# Altium PCB CONTROLADOR-V1.PcbDoc (part 1 of 2)
Units mm, origin at the board's own origin, x right, y up, seen from the top; angles counter-clockwise.
Board outline 162 x 145 mm, 2 copper layers (Top Layer, Bottom Layer); 135 components, 127 nets, 433 pads, 36 vias.
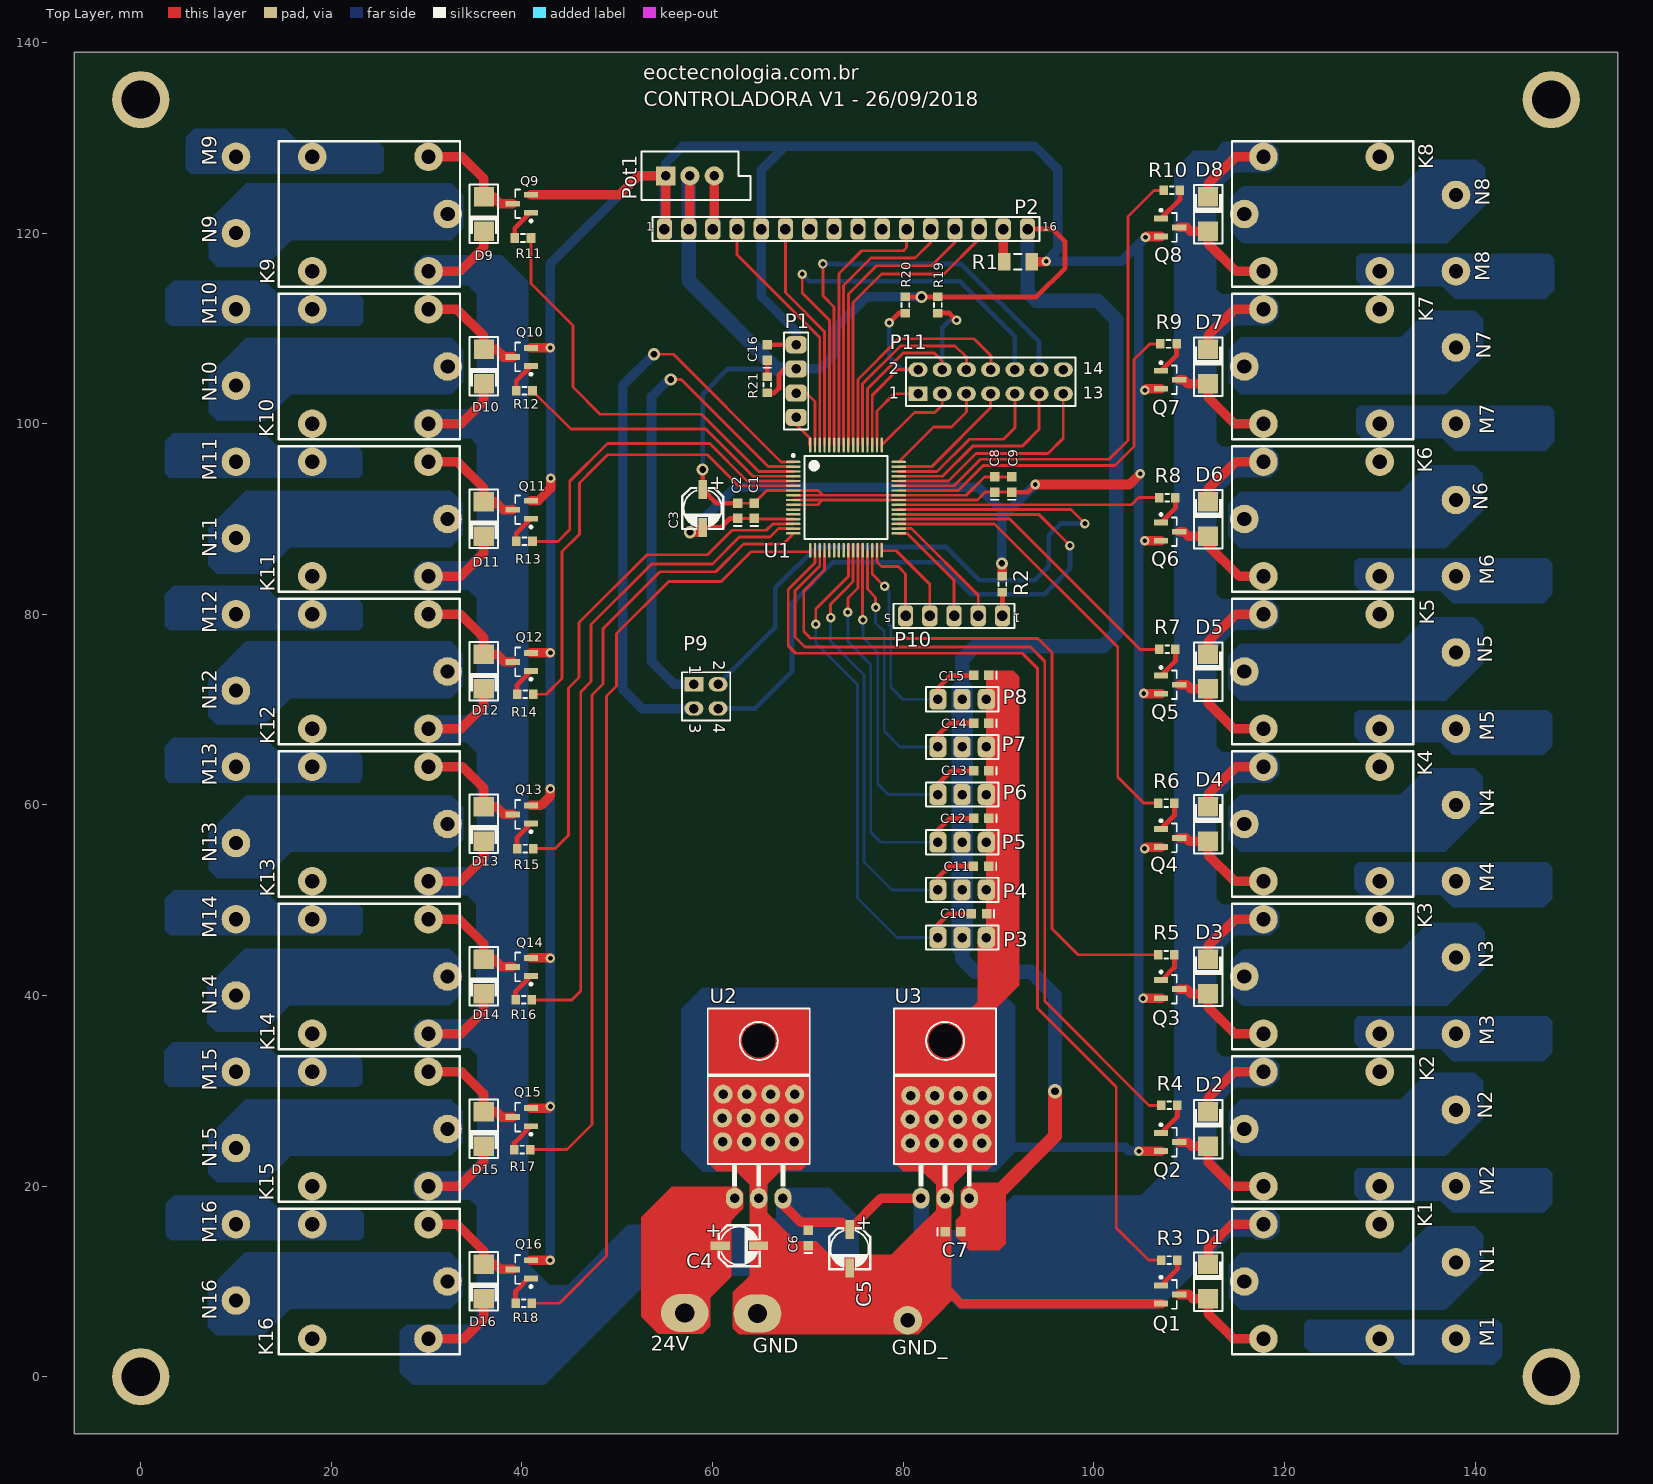
[diagram p0: Top Layer view]
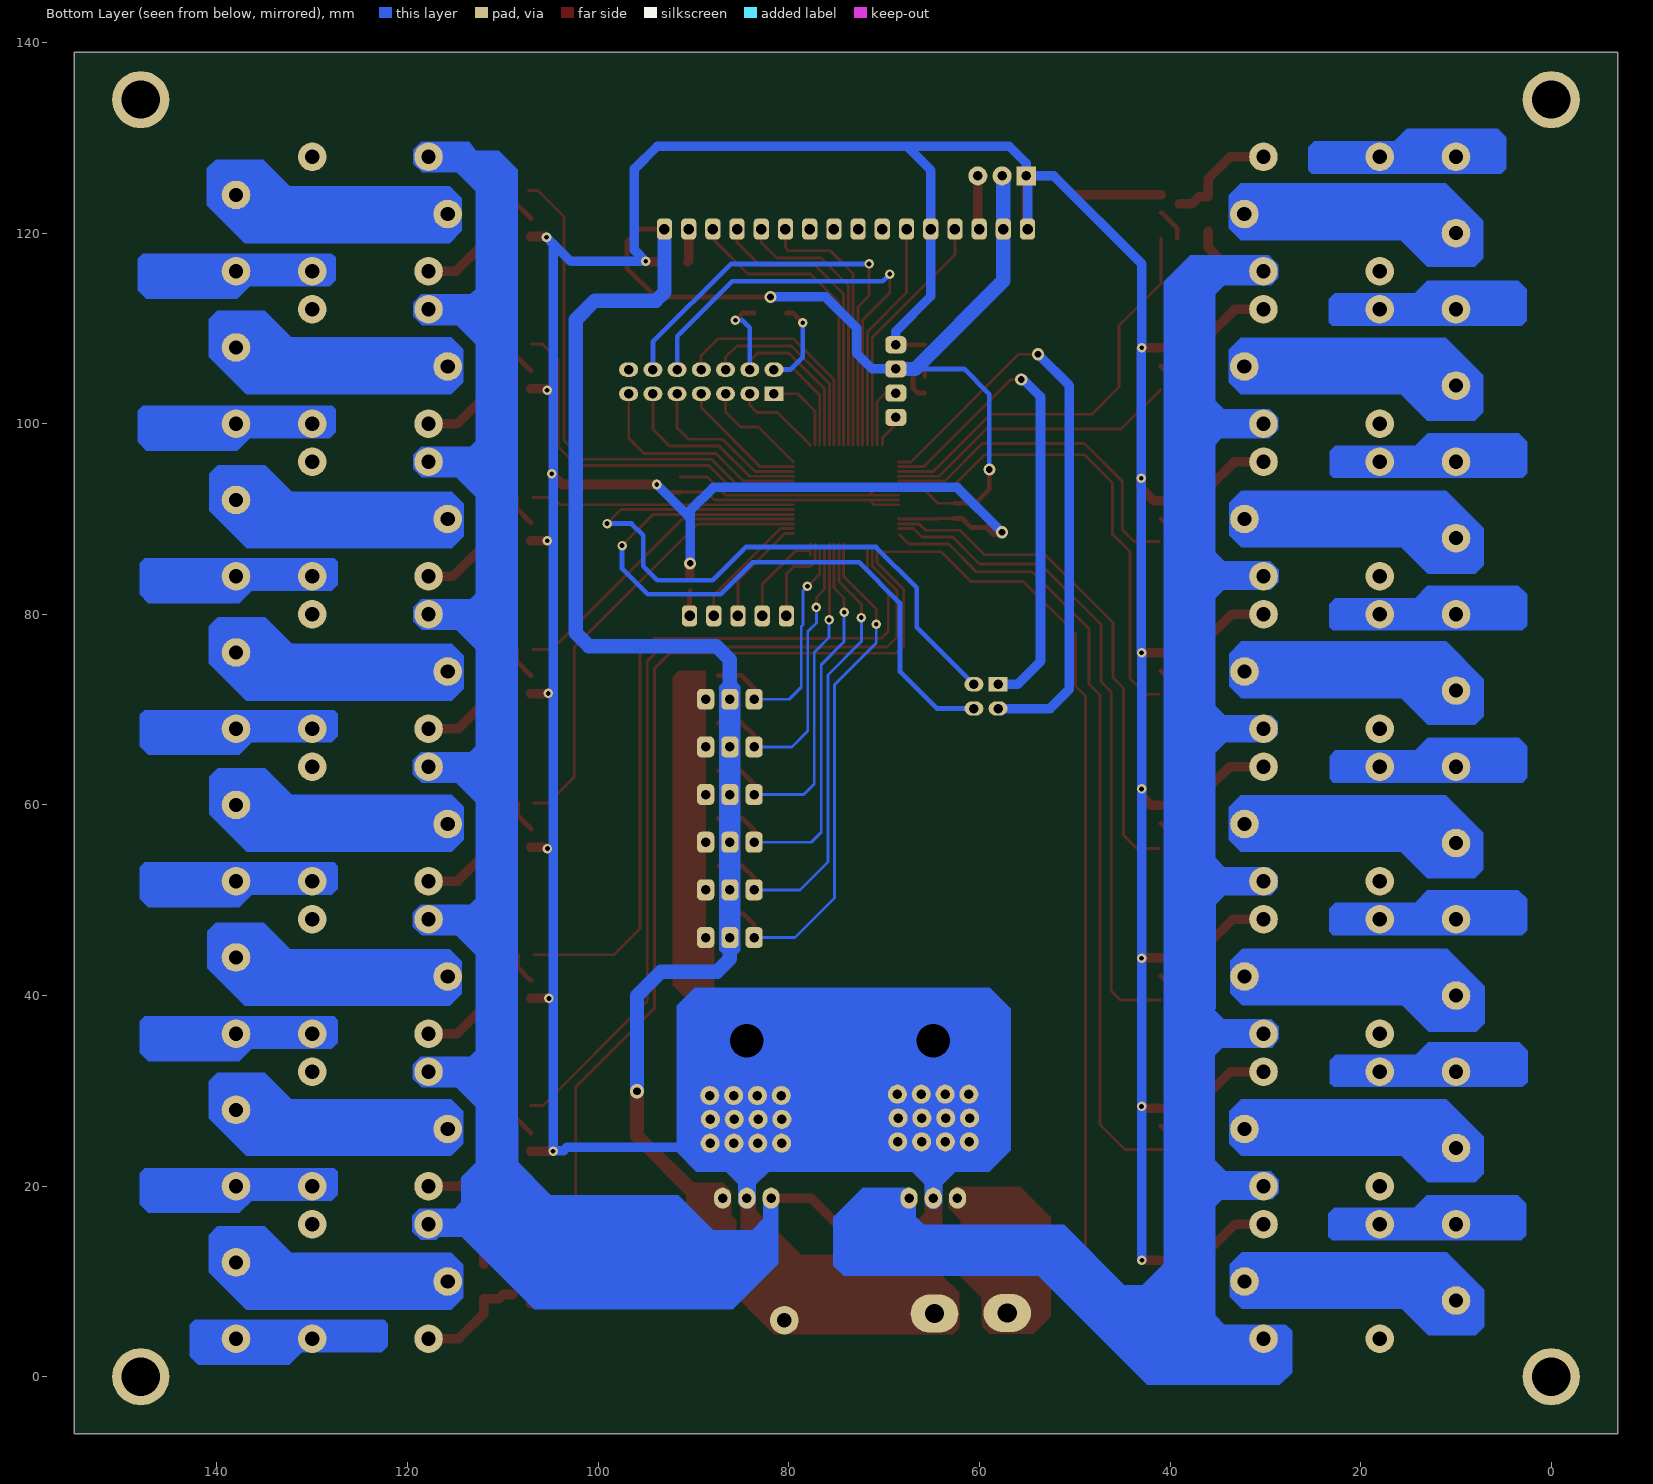
[diagram p1: Bottom Layer view, seen from below]

## Layer stack, top to bottom
Top Solder: solder mask 0.0102, Solder Resist, Dk 3.5
Top Layer: signal copper 0.0356
Dielectric 1: dielectric 0.32, FR-4, Dk 4.8
Bottom Layer: signal copper 0.0356
Bottom Solder: solder mask 0.0102, Solder Resist, Dk 3.5

## Board outline
-7,-6 -7,139 155,139 155,-6

## Design rules (kind name [scope] priority, off if disabled: settings)
Clearance [All] p1: gap=0.35 ignorepadtopadclearanceinfootprint=FALSE
PolygonConnect [All] p1: connectstyle=Relief reliefconductorwidth=0.254 reliefentries=4 polygonreliefangle="90 Angle" airgapwidth=0.254
RoomDefinition lavadora [InComponentClass('lavadora')] p1: confinementstyle=ConfineIn formatcopy=TRUE lockcomponents=FALSE outline -6.727,-5.921 154.879,-5.921 154.879,138.818 -6.727,138.818
RoomDefinition reles [InComponentClass('reles')] p2: confinementstyle=ConfineIn formatcopy=TRUE lockcomponents=FALSE outline -7.049,-5.714 154.879,-5.714 154.879,138.818 -7.049,138.818
RoutingVias [All] p1: holewidth=0.711 width=1.27 viastyle="Through Hole" minholewidth=0.711 minwidth=1.27 maxholewidth=0.711 maxwidth=1.27
SolderMaskExpansion [All] p1: expansion=0.102
Width [All] p1: maxlimit=3 minlimit=0.3 preferedwidth=1 minimp=50.000000 maximp=50.000000 favimp=50.000000
30 further rules are at their usual default settings.

## Classes and differential pairs
component class lavadora: 24V C1 C2 C3 C4 C5 C6 C7 C8 C9 C10 C11 C12 C13 C14 C15 C16 GND GND_ P1 P2 P3 P4 P5 P6 P7 P8 P9 P10 P11 Pot1 R1 R2 R19 R20 R21 U1 U2 U3
component class reles: D1 D2 D3 D4 D5 D6 D7 D8 D9 D10 D11 D12 D13 D14 D15 D16 K1 K2 K3 K4 K5 K6 K7 K8 K9 K10 K11 K12 K13 K14 K15 K16 M1 M2 M3 M4 M5 M6 M7 M8 M9 M10 M11 M12 M13 M14 M15 M16 N1 N2 N3 N4 N5 N6 N7 N8 N9 N10 N11 N12 N13 N14 N15 N16 Q1 Q2 Q3 Q4 Q5 Q6 Q7 Q8 Q9 Q10 Q11 Q12 Q13 Q14 Q15 Q16 R3 R4 R5 R6 R7 R8 R9 R10 R11 R12 R13 R14 R15 R16 R17 R18

## Components (designator, comment, footprint, x,y, rotation, side; value= is the part's Value field where it differs from the comment)
24V "PAD 1.5x3mm" "PAD 1.5x3mm"#1 54.445,6.968 r0 top
C1 "100nF 50V" CAPC0603N 64.35,90.86 r90 top
C2 "100nF 50V" CAPC0603N 62.618,90.86 r90 top
C3 "10uF 25V" "CAP_ELETR_4X5.4 SMD" 58.961,91.105 r270 top
C4 "1uF 50V" "CAP_ELETR_4X5.4 SMD" 62.805,13.762 r0 top
C5 "1uF 50V" "CAP_ELETR_4X5.4 SMD" 74.373,13.431 r270 top
C6 "100nF 50V" CAPC0603N 70.05,14.57 r90 top
C7 "100nF 50V" CAPC0603N 85.219,15.228 r0 top
C8 "100nF 50V" CAPC0603N 89.601,93.62 r90 top
C9 "100nF 50V" CAPC0603N 91.388,93.62 r90 top
C10 "100nF 50V" CAPC0603N 87.947,48.589 r180 top
C11 "100nF 50V" CAPC0603N 88.163,53.589 r180 top
C12 "100nF 50V" CAPC0603N 88.183,58.589 r180 top
C13 "100nF 50V" CAPC0603N 88.183,63.589 r180 top
C14 "100nF 50V" CAPC0603N 88.183,68.589 r180 top
C15 "100nF 50V" CAPC0603N 88.183,73.589 r180 top
C16 "100nF 50V" CAPC0603N 65.741,107.475 r90 top
D1 "M7" "DO-214AC - SMA" 112,10 r270 top
D2 "M7" "DO-214AC - SMA" 112,26 r270 top
D3 "M7" "DO-214AC - SMA" 112,42 r270 top
D4 "M7" "DO-214AC - SMA" 112,58 r270 top
D5 "M7" "DO-214AC - SMA" 112,74 r270 top
D6 "M7" "DO-214AC - SMA" 112,90 r270 top
D7 "M7" "DO-214AC - SMA" 112,106 r270 top
D8 "M7" "DO-214AC - SMA" 112,122 r270 top
D9 "M7" "DO-214AC - SMA" 36,122 r90 top
D10 "M7" "DO-214AC - SMA" 36,106 r90 top
D11 "M7" "DO-214AC - SMA" 35.992,90 r90 top
D12 "M7" "DO-214AC - SMA" 35.992,74 r90 top
D13 "M7" "DO-214AC - SMA" 35.992,58 r90 top
D14 "M7" "DO-214AC - SMA" 35.992,42 r90 top
D15 "M7" "DO-214AC - SMA" 35.992,26 r90 top
D16 "M7" "DO-214AC - SMA" 35.992,10 r90 top
GND "PAD 1.5x3mm" "PAD 1.5x3mm"#2 57.784,6.918 r0 top
GND_ "PAD 1.5x3mm" "PAD 1.5x3mm"#3 80.465,5.935 r90 top
K1 "AZ1RC2" "RELE SPDT" 124,10 r0 top
K2 "AZ1RC2" "RELE SPDT" 124,26 r0 top
K3 "AZ1RC2" "RELE SPDT" 124,42 r0 top
K4 "AZ1RC2" "RELE SPDT" 124,58 r0 top
K5 "AZ1RC2" "RELE SPDT" 124,74 r0 top
K6 "AZ1RC2" "RELE SPDT" 124,90 r0 top
K7 "AZ1RC2" "RELE SPDT" 124,106 r0 top
K8 "AZ1RC2" "RELE SPDT" 124,122 r0 top
K9 "AZ1RC2" "RELE SPDT" 24,122 r180 top
K10 "AZ1RC2" "RELE SPDT" 24,106 r180 top
K11 "AZ1RC2" "RELE SPDT" 23.992,90 r180 top
K12 "AZ1RC2" "RELE SPDT" 23.992,74 r180 top
K13 "AZ1RC2" "RELE SPDT" 23.992,58 r180 top
K14 "AZ1RC2" "RELE SPDT" 23.992,42 r180 top
K15 "AZ1RC2" "RELE SPDT" 23.992,26 r180 top
K16 "AZ1RC2" "RELE SPDT" 23.992,10 r180 top
M1 "PAD 1.5x3mm" "PAD 1.5x3mm"#4 138.496,4.025 r90 top
M2 "PAD 1.5x3mm" "PAD 1.5x3mm"#5 137.454,19.994 r90 top
M3 "PAD 1.5x3mm" "PAD 1.5x3mm"#6 136.381,35.149 r90 top
M4 "PAD 1.5x3mm" "PAD 1.5x3mm"#7 137.471,51.994 r90 top
M5 "PAD 1.5x3mm" "PAD 1.5x3mm"#8 137.686,68.13 r90 top
M6 "PAD 1.5x3mm" "PAD 1.5x3mm"#9 136.529,84.099 r90 top
M7 "PAD 1.5x3mm" "PAD 1.5x3mm"#10 136.679,99.989 r0 top
M8 "PAD 1.5x3mm" "PAD 1.5x3mm"#11 137.382,116.165 r0 top
M9 "PAD 1.5x3mm" "PAD 1.5x3mm"#12 10.134,127.973 r0 top
M10 "PAD 1.5x3mm" "PAD 1.5x3mm"#13 6.667,113.611 r0 top
M11 "PAD 1.5x3mm" "PAD 1.5x3mm"#14 9.912,96.244 r0 top
M12 "PAD 1.5x3mm" "PAD 1.5x3mm"#15 -16.079,80 r0 top
M13 "PAD 1.5x3mm" "PAD 1.5x3mm"#16 10.762,64.087 r0 top
M14 "PAD 1.5x3mm" "PAD 1.5x3mm"#17 11.137,47.964 r0 top
M15 "PAD 1.5x3mm" "PAD 1.5x3mm"#18 10.387,32.028 r90 top
M16 "PAD 1.5x3mm" "PAD 1.5x3mm"#19 10.575,15.905 r270 top
N1 "PAD 1.5x3mm" "PAD 1.5x3mm"#20 137.816,11.35 r90 top
N2 "PAD 1.5x3mm" "PAD 1.5x3mm"#21 138.467,25.941 r90 top
N3 "PAD 1.5x3mm" "PAD 1.5x3mm"#22 137.816,41.275 r90 top
N4 "PAD 1.5x3mm" "PAD 1.5x3mm"#23 136.838,56.053 r90 top
N5 "PAD 1.5x3mm" "PAD 1.5x3mm"#24 137.259,74.917 r90 top
N6 "PAD 1.5x3mm" "PAD 1.5x3mm"#25 137.723,91.459 r180 top
N7 "PAD 1.5x3mm" "PAD 1.5x3mm"#26 138.746,106.607 r90 top
N8 "PAD 1.5x3mm" "PAD 1.5x3mm"#27 138.095,121.198 r90 top
N9 "PAD 1.5x3mm" "PAD 1.5x3mm"#28 10.783,122.137 r0 top
N10 "PAD 1.5x3mm" "PAD 1.5x3mm"#29 10.048,105.82 r0 top
N11 "PAD 1.5x3mm" "PAD 1.5x3mm"#30 -1.261,90.089 r0 top
N12 "PAD 1.5x3mm" "PAD 1.5x3mm"#31 -5.23,72.82 r0 top
N13 "PAD 1.5x3mm" "PAD 1.5x3mm"#32 -0.268,55.949 r0 top
N14 "PAD 1.5x3mm" "PAD 1.5x3mm"#33 -1.658,42.254 r0 top
N15 "PAD 1.5x3mm" "PAD 1.5x3mm"#34 0.526,25.978 r0 top
N16 "PAD 1.5x3mm" "PAD 1.5x3mm"#35 10.074,7.992 r0 top
P1 "GRAVAÇÃO" "HEADER 4X2.54MM" 68.773,104.478 r90 top
P2 "BPSC-16" BPSC-16 74,120.421 r0 top
P3 "SENSOR" "HEADER 3X2.54MM" 86.183,46.089 r180 top
P4 "SENSOR" "HEADER 3X2.54MM" 86.183,51.089 r180 top
P5 "SENSOR" "HEADER 3X2.54MM" 86.183,56.089 r180 top
P6 "SENSOR" "HEADER 3X2.54MM" 86.183,61.089 r180 top
P7 "SENSOR" "HEADER 3X2.54MM" 86.183,66.089 r180 top
P8 "SENSOR" "HEADER 3X2.54MM" 86.183,71.089 r180 top
P9 "AUXILIAR" HDR2X2 58.042,72.656 r270 top
P10 "TECLAS" BPSC-5 85.334,79.841 r180 top
P11 "AUXILIAR" HDR2X7 81.558,103.136 r0 top
Pot1 "RPot" VR5 57.627,126 r0 top value=10K
Q1 "BC817" SOT23-3N 108,8.635 r0 top
Q2 "BC817" SOT23-3N 108,24.633 r0 top
Q3 "BC817" SOT23-3N 108,40.677 r0 top
Q4 "BC817" SOT23-3N 108,56.533 r0 top
Q5 "BC817" SOT23-3N 108,72.624 r0 top
Q6 "BC817" SOT23-3N 108,88.677 r0 top
Q7 "BC817" SOT23-3N 108,104.608 r0 top
Q8 "BC817" SOT23-3N 108,120.591 r0 top
Q9 "BC817" SOT23-3N 40,123.074 r180 top
Q10 "BC817" SOT23-3N 40,107 r180 top
Q11 "BC817" SOT23-3N 39.992,90.967 r180 top
Q12 "BC817" SOT23-3N 39.992,75 r180 top
Q13 "BC817" SOT23-3N 39.992,59 r180 top
Q14 "BC817" SOT23-3N 39.992,43 r180 top
Q15 "BC817" SOT23-3N 39.992,27.25 r180 top
Q16 "BC817" SOT23-3N 39.992,11.265 r180 top
R1 "470R 1/4W" RESC1206N 92.038,117 r180 top
R2 "1k 1/10W" RESC0603N 90.417,83.164 r270 top
R3 "2k2 1/10W" RESC0603N 107.927,12.249 r0 top
R4 "2k2 1/10W" RESC0603N 107.927,28.48 r0 top
R5 "2k2 1/10W" RESC0603N 107.609,44.288 r0 top
R6 "2k2 1/10W" RESC0603N 107.609,60.201 r0 top
R7 "2k2 1/10W" RESC0603N 107.716,76.327 r0 top
R8 "2k2 1/10W" RESC0603N 107.716,92.241 r0 top
R9 "2k2 1/10W" RESC0603N 107.835,108.365 r0 top
R10 "2k2 1/10W" RESC0603N 108.181,124.485 r0 top
R11 "2k2 1/10W" RESC0603N 40.1,119.484 r180 top
R12 "2k2 1/10W" RESC0603N 40.259,103.45 r180 top
R13 "2k2 1/10W" RESC0603N 40.259,87.655 r180 top
R14 "2k2 1/10W" RESC0603N 40.339,71.621 r180 top
R15 "2k2 1/10W" RESC0603N 40.339,55.427 r180 top
R16 "2k2 1/10W" RESC0603N 40.18,39.552 r180 top
R17 "2k2 1/10W" RESC0603N 40.02,23.837 r180 top
R18 "2k2 1/10W" RESC0603N 40.18,7.723 r180 top
R19 "10k 1/10W" RESC0603N 83.649,112.458 r270 top
R20 "10k 1/10W" RESC0603N 80.232,112.458 r270 top
R21 "10k 1/10W" RESC0603N 65.741,104.08 r270 top
U1 "MC9S08PA60" LQFP64 74,92.241 r0 top
U2 "LM7812CT" TO220_90 64.844,28.692 r270 top
U3 "LM7805CT" TO220_90 84.4,28.692 r270 top

## Footprints (in the part's own frame and the unit in brackets; to place one, negate y for a bottom-side part, rotate by r counter-clockwise, add the part's x,y. Pads: shape width x height; smd on the part's side, far side on the other; paste and mask are expansions set on the pad)
BPSC-5 [mm]
  rrect50% 1.6x2.2 hole 1.1: 1(-5.08,0) 2(-2.54,0) 3(0,0) 4(2.54,0) 5(5.08,0)
  silkscreen extent -6.35,-1.27 6.35,1.27, body extent -6.35,-1.24 6.35,1.24, height 8.54
BPSC-16 [mm]
  rrect50% 1.6x2.2 hole 1.1: 1(-19.05,0) 2(-16.51,0) 3(-13.97,0) 4(-11.43,0) 5(-8.89,0) 6(-6.35,0) 7(-3.81,0) 8(-1.27,0) 9(1.27,0) 10(3.81,0) 11(6.35,0) 12(8.89,0) 13(11.43,0) 14(13.97,0) 15(16.51,0) 16(19.05,0)
  silkscreen extent -20.32,-1.27 20.32,1.27, body extent -20.32,-1.24 20.32,1.25, height 8.54
"CAP_ELETR_4X5.4 SMD" [mm]
  rect 2x0.9 smd: 1(-2,0) 2(2,0)
  silkscreen extent -2.15,-2.15 2.15,2.15, body extent -2.5,-2.15 2.5,2.15, height 5.4
CAPC0603N [mm] "Chip Capacitor, Body 1.6x0.8mm, IPC Medium Density"
  rect 1x1 smd: 1(-0.8,0) 2(0.8,0)
  silkscreen extent -1.6,-0.4 -1.6,0.4, body extent -0.8,-0.4 0.8,0.4, height 0.9
"DO-214AC - SMA" [mm] "Surface Mount Glass Passivated Rectifier, Body 5.69x2.9mm,"
  rect 2x2.1 smd: 1(-1.81,0) 2(1.81,0)
  silkscreen extent -3.05,-1.5 3.09,1.5, body extent -2.5,-1.35 2.5,1.35, height 2.15
HDR2X2 [mm] "Connector; Header; 2x2 Position"
  rect 1.5x2 hole 1: 1(0,0)
  oval 1.5x2 hole 1: 2(0,2.54) 3(2.54,0) 4(2.54,2.54)
  silkscreen extent -1.27,-1.27 3.81,3.81
HDR2X7 [mm] "Connector; Header; 7x2 Position"
  rect 2x1.5 hole 1: 1(0,0)
  oval 2x1.5 hole 1: 2(0,2.54) 3(2.54,0) 4(2.54,2.54) 5(5.08,0) 6(5.08,2.54) 7(7.62,0) 8(7.62,2.54) 9(10.16,0) 10(10.16,2.54) 11(12.7,0) 12(12.7,2.54) 13(15.24,0) 14(15.24,2.54)
  silkscreen extent -1.27,-1.27 16.51,3.81
"HEADER 3X2.54MM" [mm] "Barra de pinos, 3 pinos, espaçamento 2.54mm, Body 7.62x2.54mm"
  rrect50% 1.8x2.2 hole 1: 1(-2.54,0) 2(0,0) 3(2.54,0)
  silkscreen extent -3.81,-1.27 3.81,1.27, body extent -3.81,-1.25 3.81,1.24, height 8.54
"HEADER 4X2.54MM" [mm] "Barra de pinos, 4 pinos, espaçamento 2.54mm, Body 12.95x2.54mm"
  rrect50% 1.8x2.2 hole 1: 1(-3.81,0) 2(-1.27,0) 3(1.27,0) 4(3.81,0)
  silkscreen extent -5.08,-1.27 5.08,1.27, body extent -5.08,-1.24 5.08,1.24, height 8.55
LQFP64 [mm] "10 x 10 x  1.4 mm"
  oval 1.55x0.25 smd: 1(-5.525,3.75) 2(-5.525,3.25) 3(-5.525,2.75) 4(-5.525,2.25) 5(-5.525,1.75) 6(-5.525,1.25) 7(-5.525,0.75) 8(-5.525,0.25) 9(-5.525,-0.25) 10(-5.525,-0.75) 11(-5.525,-1.25) 12(-5.525,-1.75) 13(-5.525,-2.25) 14(-5.525,-2.75) 15(-5.525,-3.25) 16(-5.525,-3.75) 33(5.525,-3.75) 34(5.525,-3.25) 35(5.525,-2.75) 36(5.525,-2.25) 37(5.525,-1.75) 38(5.525,-1.25) 39(5.525,-0.75) 40(5.525,-0.25) 41(5.525,0.25) 42(5.525,0.75) 43(5.525,1.25) 44(5.525,1.75) 45(5.525,2.25) 46(5.525,2.75) 47(5.525,3.25) 48(5.525,3.75)
  oval 0.25x1.55 smd: 17(-3.75,-5.525) 18(-3.25,-5.525) 19(-2.75,-5.525) 20(-2.25,-5.525) 21(-1.75,-5.525) 22(-1.25,-5.525) 23(-0.75,-5.525) 24(-0.25,-5.525) 25(0.25,-5.525) 26(0.75,-5.525) 27(1.25,-5.525) 28(1.75,-5.525) 29(2.25,-5.525) 30(2.75,-5.525) 31(3.25,-5.525) 32(3.75,-5.525) 49(3.75,5.525) 50(3.25,5.525) 51(2.75,5.525) 52(2.25,5.525) 53(1.75,5.525) 54(1.25,5.525) 55(0.75,5.525) 56(0.25,5.525) 57(-0.25,5.525) 58(-0.75,5.525) 59(-1.25,5.525) 60(-1.75,5.525) 61(-2.25,5.525) 62(-2.75,5.525) 63(-3.25,5.525) 64(-3.75,5.525)
  silkscreen extent -5.65,-4.35 4.35,4.55, body extent -5,-5 5,5, height 1.6
"PAD 1.5x3mm"#1 [mm]
  oval 5x4 hole 2: 1(2.635,-0.276)
"PAD 1.5x3mm"#2 [mm]
  oval 5x4 hole 2: 1(6.932,-0.291)
"PAD 1.5x3mm"#3 [mm]
  round 3 hole 1.5: 1(0,0)
"PAD 1.5x3mm"#4 [mm]
  round 3 hole 1.5: 1(-0.025,0.496)
"PAD 1.5x3mm"#5 [mm]
  round 3 hole 1.5: 1(0.006,-0.546)
"PAD 1.5x3mm"#6 [mm]
  round 3 hole 1.5: 1(0.851,-1.619)
"PAD 1.5x3mm"#7 [mm]
  round 3 hole 1.5: 1(0.006,-0.529)
"PAD 1.5x3mm"#8 [mm]
  round 3 hole 1.5: 1(-0.13,-0.314)
"PAD 1.5x3mm"#9 [mm]
  round 3 hole 1.5: 1(-0.099,-1.471)
"PAD 1.5x3mm"#10 [mm]
  round 3 hole 1.5: 1(1.321,0.011)
"PAD 1.5x3mm"#11 [mm]
  round 3 hole 1.5: 1(0.618,-0.165)
"PAD 1.5x3mm"#12 [mm]
  round 3 hole 1.5: 1(-0.134,0.027)
"PAD 1.5x3mm"#13 [mm]
  round 3 hole 1.5 unplated: 1(3.333,-1.611)
"PAD 1.5x3mm"#14 [mm]
  round 3 hole 1.5: 1(0.08,-0.244)
"PAD 1.5x3mm"#15 [mm]
  round 3 hole 1.5 unplated: 1(26.071,0)
"PAD 1.5x3mm"#16 [mm]
  round 3 hole 1.5: 1(-0.77,-0.087)
"PAD 1.5x3mm"#17 [mm]
  round 3 hole 1.5: 1(-1.145,0.036)
"PAD 1.5x3mm"#18 [mm]
  round 3 hole 1.5: 1(-0.028,0.395)
"PAD 1.5x3mm"#19 [mm]
  round 3 hole 1.5: 1(-0.095,-0.583)
"PAD 1.5x3mm"#20 [mm]
  round 3 hole 1.5: 1(0.65,-0.184)
"PAD 1.5x3mm"#21 [mm]
  round 3 hole 1.5: 1(2.059,0.467)
"PAD 1.5x3mm"#22 [mm]
  round 3 hole 1.5: 1(2.725,-0.184)
"PAD 1.5x3mm"#23 [mm]
  round 3 hole 1.5: 1(3.947,-1.162)
"PAD 1.5x3mm"#24 [mm]
  round 3 hole 1.5: 1(1.083,-0.741)
"PAD 1.5x3mm"#25 [mm]
  round 3 hole 1.5: 1(-0.277,-0.541)
"PAD 1.5x3mm"#26 [mm]
  round 3 hole 1.5: 1(1.393,0.746)
"PAD 1.5x3mm"#27 [mm]
  round 3 hole 1.5: 1(2.802,0.095)
"PAD 1.5x3mm"#28 [mm]
  round 3 hole 1.5: 1(-0.783,-2.137)
"PAD 1.5x3mm"#29 [mm]
  round 3 hole 1.5: 1(-0.048,-1.82)
"PAD 1.5x3mm"#30 [mm]
  round 3 hole 1.5: 1(11.253,-2.089)
"PAD 1.5x3mm"#31 [mm]
  round 3 hole 1.5: 1(15.222,-0.82)
"PAD 1.5x3mm"#32 [mm]
  round 3 hole 1.5: 1(10.26,0.051)
"PAD 1.5x3mm"#33 [mm]
  round 3 hole 1.5: 1(11.65,-2.254)
"PAD 1.5x3mm"#34 [mm]
  round 3 hole 1.5: 1(9.466,-1.978)
"PAD 1.5x3mm"#35 [mm]
  round 3 hole 1.5: 1(-0.082,0.008)
"RELE SPDT" [mm]
  round 3 hole 1.5: 1(-8.2,0) 2(6,-6) 3(6,6) 4(-6.2,6) 5(-6.2,-6)
  silkscreen extent -9.5,-7.65 9.5,7.65, body extent -9.4,-7.49 9.4,7.51, height 15.4
RESC0603N [mm] "Chip Resistor, Body 1.6x0.8mm, IPC Medium Density"
  rect 0.9x1 smd: 1(-0.85,0) 2(0.85,0)
  silkscreen extent -0.2,-0.4 0.2,0.4, body extent -0.8,-0.45 0.8,0.45, height 0.5
RESC1206N [mm] "Chip Resistor, Body 3.2x1.6mm, IPC Medium Density"
  rect 1.3x1.8 smd: 1(-1.45,0) 2(1.45,0)
  silkscreen extent -0.4,-0.8 0.4,0.8, body extent -1.6,-0.8 1.6,0.8, height 0.6
SOT23-3N [mm] "SOT23, 3-Leads, Body 2.9x1.3mm, Pitch 0.95mm, Lead Span 2.5mm, IPC Medium Density"
  rect 1.5x0.6 smd: 1(-0.95,0.95) 2(-0.95,-0.95) 3(0.95,0)
  silkscreen extent -1.07,-1.5 0.7,1.92, body extent -1.4,-1.45 1.4,1.45, height 1.28
TO220_90 [mm]
  round 0 hole 3.5: 0(-6.55,0)
  oval 2.2x1.8 hole 1: 1(9.95,-2.54) 2(9.95,0) 3(9.95,2.54)
  silkscreen extent -9.95,-5.35 8.71,5.35, body extent -9.17,-5.08 10.11,5.08, height 4.45
VR5 [mm] "Thru-Hole; 3 Leads"
  rect 2x2 hole 1: 1(-2.54,0)
  round 2 hole 1: 2(0,0) 3(2.54,0)
  silkscreen extent -5.08,-2.54 6.35,2.54

## Part data
24V GND GND_ M1 M2 M3 M4 M5 M6 M7 M8 M9 M10 M11 M12 M13 M14 M15 M16 N1 N2 N3 N4 N5 N6 N7 N8 N9 N10 N11 N12 N13 N14 N15 N16: "PAD"
C1 C2 C6 C7 C8 C9 C10 C11 C12 C13 C14 C15 C16: library part "Cap 100nF 50V 0603", "CAP CER 0.1UF 50V X7R 0603", Manufacturer="Samsung Electro-Mechanics America, Inc.", Manufacturer Part Number=CL10B104KB8NNNC, Operating Temperature="-55°C ~ 125°C", Package / Case="0603 (1608 Metric)", Ratings=-, Supplier Part Number 1=1276-1000-1-ND, Temperature Coefficient=X7R, Tolerance=±10%, Voltage - Rated=50V, Applications="General Purpose", Category=Capacitors, ComponentLink1Description=http://media.digikey.com/pdf/Data%20Sheets/Samsung%20PDFs/CL_Series_MLCC_ds.pdf, ComponentLink1URL=http://media.digikey.com/pdf/Data%20Sheets/Samsung%20PDFs/CL_Series_MLCC_ds.pdf, Código=1766, Features=-, Height - Seated (Max)=-, Lead Spacing=-, Lead Style=-, Montagem=SMD, Mounting Type="Surface Mount, MLCC", Packaging="Cut Tape (CT)", Part Status=Active, Pricing 1="1=0.1, 10=0.027, 100=0.0122, 500=0.00874, 1000=0.00687 (USD)", RoHS="RoHS Compliant", Size / Dimension="0.063\" L x 0.032\" W (1.60mm x 0.80mm)", Stock 1=3548129, Supplier 1=Digi-Key, Thickness (Max)="0.035\" (0.90mm)"
C3: library part "Cap Eletrolitico 10uF 25V", "CAP ALUM 10UF 20% 25V SMD", ESR (Equivalent Series Resistance)=-, Lifetime @ Temp.="1000 Hrs @ 85°C", Manufacturer="Panasonic Electronic Components", Manufacturer Part Number=EEE-1EA100WR, Operating Temperature="-40°C ~ 85°C", Package / Case="Radial, Can - SMD", Ripple Current - High Frequency="37.4mA @ 10kHz", Ripple Current - Low Frequency="22mA @ 120Hz", Supplier Part Number 1=PCE3895CT-ND, Tolerance=±20%, Applications="General Purpose", Category=Capacitors, ComponentLink1Description=https://industrial.panasonic.com/cdbs/www-data/pdf/RDE0000/ABA0000C1145.pdf, ComponentLink1URL=https://industrial.panasonic.com/cdbs/www-data/pdf/RDE0000/ABA0000C1145.pdf, Código=2170, Height - Seated (Max)="0.213\" (5.40mm)", Lead Spacing=-, Montagem=SMD, Mounting Type="Surface Mount", Packaging="Cut Tape (CT)", Part Status=Active, Polarization=Polar, Pricing 1="1=0.31, 10=0.21, 100=0.1191, 500=0.08404, 1000=0.07354 (USD)", RoHS="RoHS Compliant", Size / Dimension="0.157\" Dia (4.00mm)", Stock 1=101827, Supplier 1=Digi-Key, Surface Mount Land Size="0.169\" L x 0.169\" W (4.30mm x 4.30mm)"
C4 C5: library part "Cap Eletrolitico 1uF 50V", "CAP ALUM 1UF 20% 50V SMD", ESR (Equivalent Series Resistance)=-, Lifetime @ Temp.="1000 Hrs @ 105°C", Manufacturer="Panasonic Electronic Components", Manufacturer Part Number=EEE-HA1H1R0R, Operating Temperature="-40°C ~ 105°C", Package / Case="Radial, Can - SMD", Ripple Current - High Frequency="17mA @ 10kHz", Ripple Current - Low Frequency="10mA @ 120Hz", Supplier Part Number 1=PCE4212CT-ND, Tolerance=±20%, Applications=Automotive, Category=Capacitors, ComponentLink1Description=https://industrial.panasonic.com/cdbs/www-data/pdf/RDE0000/ABA0000C1151.pdf, ComponentLink1URL=https://industrial.panasonic.com/cdbs/www-data/pdf/RDE0000/ABA0000C1151.pdf, Height - Seated (Max)="0.213\" (5.40mm)", Lead Spacing=-, Montagem=SMD, Mounting Type="Surface Mount", Packaging="Cut Tape (CT)", Part Status=Active, Polarization=Polar, Pricing 1="1=0.32, 10=0.217, 100=0.1232, 500=0.08694, 1000=0.07607 (USD)", RoHS="RoHS Compliant", Size / Dimension="0.157\" Dia (4.00mm)", Stock 1=21464, Supplier 1=Digi-Key, Surface Mount Land Size="0.169\" L x 0.169\" W (4.30mm x 4.30mm)"
D1 D2 D3 D4 D5 D6 D7 D8 D9 D10 D11 D12 D13 D14 D15 D16: library part "Diodo M7", "DIODE GEN PURP 1KV 1A DO214AC", Capacitance @ Vr, F="15pF @ 4V, 1MHz", Current - Average Rectified (Io)=1A, Current - Reverse Leakage @ Vr="10µA @ 1000V", Manufacturer=Kingtronics, Operating Temperature - Junction="-55°C ~ 150°C", Package / Case="DO-214AC, SMA", Supplier Device Package="DO-214AC (SMA)", Supplier Part Number 1=GS1M-LTPMSCT-ND, Voltage - DC Reverse (Vr) (Max)="1000V (1kV)", Voltage - Forward (Vf) (Max) @ If="1V @ 1A", Category="Discrete Semiconductor Products", ComponentLink1Description=http://www.kingtronics.com/pdf/M7-diode.pdf, ComponentLink1URL=http://www.kingtronics.com/pdf/M7-diode.pdf, Código=2412, Diode Type=Standard, Manufacturer Part Number=M7, Montagem=SMD, Mounting Type="Surface Mount", Packaging="Cut Tape (CT)", Part Status=Active, Pricing 1="1=0.28, 10=0.258, 25=0.1856, 100=0.1442, 250=0.09064, 500=0.07726, 1000=0.05253, 2500=0.04738 (USD)", RoHS="RoHS Compliant", Speed="Standard Recovery >500ns, > 200mA (Io)", Stock 1=30717, Supplier 1=Digi-Key
K1 K2 K3 K4 K5 K6 K7 K8 K9 K10 K11 K12 K13 K14 K15 K16: library part "Rele AZ1RC2", "RELAY GEN PURPOSE SPDT 10A 12V", Coil Power="360 mW", Coil Resistance="400 Ohms", Coil Voltage=12VDC, Manufacturer=Metaltex, Operating Temperature="-40°C ~ 85°C", Supplier Part Number 1=Z1012-ND, Switching Voltage="250VAC, 30VDC - Max", Turn Off Voltage (Min)="1.2 VDC", Turn On Voltage (Max)="9 VDC", Category=Relays, Coil Type="Non Latching", ComponentLink1Description=http://www.metaltex.com.br/downloads/AZ.pdf, ComponentLink1URL=http://www.metaltex.com.br/downloads/AZ.pdf, Contact Form="SPDT (1 Form C)", Contact Material="Silver Tin Oxide (AgSnO)", Código=2567, Manufacturer Part Number=AZ1RC2, Montagem=PTH, Mounting Type="Through Hole", Packaging=Tray, Part Status=Active, Pricing 1="1=1.33, 10=1.247, 25=1.108, 50=1.0526, 100=0.9972, 250=0.8864, 500=0.831 (USD)", Relay Type="General Purpose", RoHS="RoHS Compliant", Stock 1=37370, Supplier 1=Digi-Key, Termination Style="PC Pin"
P1: library part "Barra de pinos simples 180°, 4 pinos", "CONN HEADER 4 POS 2.54", Current Rating=3A, Insulation Color=Black, Manufacturer=Metaltex, Manufacturer Part Number=BPSC-4, Material Flammability Rating="UL94 V-0", Operating Temperature="-40°C ~ 125°C", Supplier Part Number 1=732-5317-ND, Voltage Rating=250V, Applications=-, Category="Connectors, Interconnects", ComponentLink1Description=http://www.metaltex.com.br/produtos/componentes/4091/conectores_para_pci/4094/bp_barra_de_pinos, ComponentLink1URL=http://www.metaltex.com.br/produtos/componentes/4091/conectores_para_pci/4094/bp_barra_de_pinos, Connector Type=Header, Contact Finish - Mating=Gold, Contact Finish - Post=-, Contact Finish Thickness - Mating=-, Contact Finish Thickness - Post=-, Contact Length - Mating="0.236\" (6.00mm)", Contact Length - Post="0.118\" (3.00mm)", Contact Material="Copper Alloy", Contact Shape=Square, Contact Type="Male Pin", Código=2308, Fastening Type=Push-Pull, Features=-, Ingress Protection=-, Insulation Height="0.100\" (2.54mm)", Insulation Material="Polybutylene Terephthalate (PBT)", Mated Stacking Heights=-, Montagem=PTH, Mounting Type="Through Hole", Number of Positions=4, Number of Positions Loaded=All, Number of Rows=1, Overall Contact Length="0.454\" (11.54mm)", Packaging=Bulk, Part Status=Active, Pitch - Mating="0.100\" (2.54mm)", Pricing 1="1=0.18, 10=0.153, 25=0.1272, 50=0.106, 100=0.096, 1000=0.088 (USD)", RoHS="RoHS Compliant", Row Spacing - Mating=-, Shrouding=Unshrouded, Stock 1=2640, Style="Board to Board or Cable", Supplier 1=Digi-Key, Termination=Solder
P2: library part "Barra de pinos simples 180º, 16 pinos", "CONN HEADER 16POS 2.54MM VERT", Color=Black, Manufacturer="Molex Inc", Manufacturer Part Number=0022284160, Supplier Part Number 1=WM50014-16-ND, Category="Connectors, Interconnects", ComponentLink1Description=http://www.molex.com/pdm_docs/sd/022284160_sd.pdf, ComponentLink1URL=http://www.molex.com/pdm_docs/sd/022284160_sd.pdf, Connector Type="Header, Unshrouded, Breakaway", Contact Finish=Tin, Contact Finish Thickness="100µin (2.54µm)", Contact Mating Length="0.240\" (6.10mm)", Contact Type="Male Pin", Fastening Type=-, Features=-, Mounting Type="Through Hole", Number of Positions=16, Number of Positions Loaded=All, Number of Rows=1, Packaging=Bulk, Pitch="0.100\" (2.54mm)", Pricing 1="1=0.52, 10=0.461, 100=0.3797, 500=0.30012, 1000=0.25763, 5000=0.23503, 10000=0.22599 (USD)", RoHS="RoHS Compliant", Row Spacing=-, Stock 1=0, Supplier 1=Digi-Key, Termination=Solder
P3 P4 P5 P6 P7 P8: library part "Barra de pinos simples 180°, 3 pinos", "CONN HEADER 3 POS 2.54", Current Rating=3A, Insulation Color=Black, Manufacturer=Metaltex, Manufacturer Part Number=BPSC-3, Material Flammability Rating="UL94 V-0", Operating Temperature="-40°C ~ 125°C", Supplier Part Number 1=732-5316-ND, Voltage Rating=250V, Applications=-, Category="Connectors, Interconnects", ComponentLink1Description=http://www.metaltex.com.br/produtos/componentes/4091/conectores_para_pci/4094/bp_barra_de_pinos, ComponentLink1URL=http://www.metaltex.com.br/produtos/componentes/4091/conectores_para_pci/4094/bp_barra_de_pinos, Connector Type=Header, Contact Finish - Mating=Gold, Contact Finish - Post=-, Contact Finish Thickness - Mating=-, Contact Finish Thickness - Post=-, Contact Length - Mating="0.236\" (6.00mm)", Contact Length - Post="0.118\" (3.00mm)", Contact Material="Copper Alloy", Contact Shape=Square, Contact Type="Male Pin", Código=2307, Fastening Type=Push-Pull, Features=-, Ingress Protection=-, Insulation Height="0.100\" (2.54mm)", Insulation Material="Polybutylene Terephthalate (PBT)", Mated Stacking Heights=-, Montagem=PTH, Mounting Type="Through Hole", Number of Positions=3, Number of Positions Loaded=All, Number of Rows=1, Overall Contact Length="0.454\" (11.54mm)", Packaging=Bulk, Part Status=Active, Pitch - Mating="0.100\" (2.54mm)", Pricing 1="1=0.18, 10=0.153, 25=0.1272, 50=0.106, 100=0.096, 1000=0.088 (USD)", RoHS="RoHS Compliant", Row Spacing - Mating=-, Shrouding=Unshrouded, Stock 1=2640, Style="Board to Board or Cable", Supplier 1=Digi-Key, Termination=Solder
P9: library part "Header 2X2", "Header, 2-Pin, Dual row", LatestRevisionDate=17-Jul-2002, LatestRevisionNote="Re-released for DXP Platform.", Publisher="Altium Limited"
P10: library part "Barra de pinos simples 180º, 5 pinos", "CONN HEADER 5POS 2.54MM VERT", Color=Black, Manufacturer="Molex Inc", Manufacturer Part Number=0022284050, Supplier Part Number 1=WM50014-05-ND, Category="Connectors, Interconnects", ComponentLink1Description=http://www.molex.com/pdm_docs/sd/022284050_sd.pdf, ComponentLink1URL=http://www.molex.com/pdm_docs/sd/022284050_sd.pdf, Connector Type="Header, Unshrouded, Breakaway", Contact Finish=Tin, Contact Finish Thickness="100µin (2.54µm)", Contact Mating Length="0.240\" (6.10mm)", Contact Type="Male Pin", Fastening Type=-, Features=-, Mounting Type="Through Hole", Number of Positions=5, Number of Positions Loaded=All, Number of Rows=1, Packaging=Bulk, Pitch="0.100\" (2.54mm)", Pricing 1="1=0.27, 10=0.24, 100=0.1976, 500=0.15622, 1000=0.13411, 5000=0.12234, 10000=0.11764 (USD)", RoHS="RoHS Compliant", Row Spacing=-, Stock 1=0, Supplier 1=Digi-Key, Termination=Solder
P11: library part "Header 7X2", "Header, 7-Pin, Dual row", LatestRevisionDate=17-Jul-2002, LatestRevisionNote="Re-released for DXP Platform.", Publisher="Altium Limited"
Pot1: "Potentiometer", LatestRevisionDate=17-Jul-2002, LatestRevisionNote="Re-released for DXP Platform.", PackageDescription="Variable Resistor, Thru-Hole; 3 Leads", PackageReference=VR5, Published=8-Jun-2000, Publisher="Altium Limited", Set Position=0.5, Sim Note="Enter the Resistance value and the set point into parameter fields."
Q1 Q2 Q3 Q4 Q5 Q6 Q7 Q8 Q9 Q10 Q11 Q12 Q13 Q14 Q15 Q16: library part "Transistor NPN BC817", "TRANS NPN 45V 0.5A SOT23", Current - Collector (Ic) (Max)=500mA, Current - Collector Cutoff (Max)="100nA (ICBO)", DC Current Gain (hFE) (Min) @ Ic, Vce="160 @ 100mA, 1V", Frequency - Transition=100MHz, Manufacturer="ON Semiconductor", Manufacturer Part Number=BC817-25LT1G, Operating Temperature="-65°C ~ 150°C (TJ)", Package / Case="TO-236-3, SC-59, SOT-23-3", Power - Max=300mW, Supplier Device Package="SOT-23-3 (TO-236)", Supplier Part Number 1=BC817-25LT1GOSCT-ND, Voltage - Collector Emitter Breakdown (Max)=45V, Category="Discrete Semiconductor Products", ComponentLink1Description=http://www.onsemi.com/pub_link/Collateral/BC817-16LT1-D.PDF, ComponentLink1URL=http://www.onsemi.com/pub_link/Collateral/BC817-16LT1-D.PDF, Código=1795, Montagem=SMD, Mounting Type="Surface Mount", Packaging="Cut Tape (CT)", Part Status=Active, Pricing 1="1=0.12, 10=0.109, 100=0.0594, 500=0.03654, 1000=0.02492 (USD)", RoHS="RoHS Compliant", Stock 1=101484, Supplier 1=Digi-Key, Transistor Type=NPN, Vce Saturation (Max) @ Ib, Ic="700mV @ 50mA, 500mA"
R1: library part "Res 470R 1/4W 5% 1206", "RES SMD 470 OHM 5% 1/4W 1206", Manufacturer="Stackpole Electronics Inc.", Manufacturer Part Number=RMCF1206JT470R, Operating Temperature="-55°C ~ 155°C", Package / Case="1206 (3216 Metric)", Power (Watts)="0.25W, 1/4W", Supplier Device Package=1206, Supplier Part Number 1=RMCF1206JT470RCT-ND, Temperature Coefficient=±200ppm/°C, Tolerance=±5%, Category=Resistors, ComponentLink1Description=https://www.seielect.com/Catalog/SEI-RMCF_RMCP.pdf, ComponentLink1URL=https://www.seielect.com/Catalog/SEI-RMCF_RMCP.pdf, Composition="Thick Film", Código=2021, Failure Rate=-, Features="Automotive AEC-Q200", Height - Seated (Max)="0.028\" (0.70mm)", Montagem=SMD, Packaging="Cut Tape (CT)", Part Status=Active, Pricing 1="1=0.1, 10=0.026, 100=0.0108, 1000=0.00484, 2500=0.0042 (USD)", RoHS="RoHS Compliant", Size / Dimension="0.126\" L x 0.063\" W (3.20mm x 1.60mm)", Stock 1=392377, Supplier 1=Digi-Key
R2: library part "Res 1k 1/10W 5% 0603", "RES SMD 1K OHM 5% 1/10W 0603", Manufacturer="Stackpole Electronics Inc.", Manufacturer Part Number=RMCF0603JT1K00, Operating Temperature="-55°C ~ 155°C", Package / Case="0603 (1608 Metric)", Power (Watts)="0.1W, 1/10W", Supplier Device Package=0603, Supplier Part Number 1=RMCF0603JT1K00CT-ND, Temperature Coefficient=±200ppm/°C, Tolerance=±5%, Category=Resistors, ComponentLink1Description=https://www.seielect.com/Catalog/SEI-RMCF_RMCP.pdf, ComponentLink1URL=https://www.seielect.com/Catalog/SEI-RMCF_RMCP.pdf, Composition="Thick Film", Código=2537, Failure Rate=-, Features="Automotive AEC-Q200", Height - Seated (Max)="0.022\" (0.55mm)", Montagem=SMD, Packaging="Cut Tape (CT)", Part Status=Active, Pricing 1="1=0.1, 10=0.013, 100=0.0054, 1000=0.00242, 2500=0.0021 (USD)", RoHS="RoHS Compliant", Size / Dimension="0.061\" L x 0.031\" W (1.55mm x 0.80mm)", Stock 1=323501, Supplier 1=Digi-Key
R3 R4 R5 R6 R7 R8 R9 R10 R11 R12 R13 R14 R15 R16 R17 R18: library part "Res 2k2 1/10W 5% 0603", "RES SMD 2.2K OHM 5% 1/10W 0603", Manufacturer="Stackpole Electronics Inc.", Manufacturer Part Number=RMCF0603JT2K20, Operating Temperature="-55°C ~ 155°C", Package / Case="0603 (1608 Metric)", Power (Watts)="0.1W, 1/10W", Supplier Device Package=0603, Supplier Part Number 1=RMCF0603JT2K20CT-ND, Temperature Coefficient=±200ppm/°C, Tolerance=±5%, Category=Resistors, ComponentLink1Description=https://www.seielect.com/Catalog/SEI-RMCF_RMCP.pdf, ComponentLink1URL=https://www.seielect.com/Catalog/SEI-RMCF_RMCP.pdf, Composition="Thick Film", Código=1850, Failure Rate=-, Features="Automotive AEC-Q200", Height - Seated (Max)="0.022\" (0.55mm)", Montagem=SMD, Packaging="Cut Tape (CT)", Part Status=Active, Pricing 1="1=0.1, 10=0.013, 100=0.0054, 1000=0.00242, 2500=0.0021 (USD)", RoHS="RoHS Compliant", Size / Dimension="0.061\" L x 0.031\" W (1.55mm x 0.80mm)", Stock 1=224282, Supplier 1=Digi-Key
R19 R20 R21: library part "Res 10k 1/10W 5% 0603", "RES SMD 10K OHM 5% 1/10W 0603", Manufacturer="Stackpole Electronics Inc.", Manufacturer Part Number=RMCF0603JT10K0, Operating Temperature="-55°C ~ 155°C", Package / Case="0603 (1608 Metric)", Power (Watts)="0.1W, 1/10W", Supplier Device Package=0603, Supplier Part Number 1=RMCF0603JT10K0CT-ND, Temperature Coefficient=±200ppm/°C, Tolerance=±5%, Category=Resistors, ComponentLink1Description=https://www.seielect.com/Catalog/SEI-RMCF_RMCP.pdf, ComponentLink1URL=https://www.seielect.com/Catalog/SEI-RMCF_RMCP.pdf, Composition="Thick Film", Código=1772, Failure Rate=-, Features="Automotive AEC-Q200", Height - Seated (Max)="0.022\" (0.55mm)", Montagem=SMD, Packaging="Cut Tape (CT)", Part Status=Active, Pricing 1="1=0.1, 10=0.013, 100=0.0054, 1000=0.00242, 2500=0.0021 (USD)", RoHS="RoHS Compliant", Size / Dimension="0.061\" L x 0.031\" W (1.55mm x 0.80mm)", Stock 1=969403, Supplier 1=Digi-Key
U1: library part "Microcontrolador MC9S08PA60AVLC", "IC MCU 8BIT 60KB FLASH 64LQFP"
U2 U3: library part "Regulador de tensão LM7805CT", "IC REG LINEAR 5V 1A TO220-3", Current - Output=1A, Manufacturer="Texas Instruments", Manufacturer Part Number=LM7805CT/NOPB, Operating Temperature="0°C ~ 125°C", Package / Case=TO-220-3, Supplier Part Number 1=296-47192-ND, Voltage - Input (Max)=35V, Voltage - Output (Max)=-, Voltage - Output (Min/Fixed)=5V, Voltage Dropout (Max)="2V @ 1A", Category="Integrated Circuits (ICs)", ComponentLink1Description=http://www.ti.com/lit/ds/symlink/lm340.pdf, ComponentLink1URL=http://www.ti.com/lit/ds/symlink/lm340.pdf, Control Features=-, Código=329, Montagem=PTH, Mounting Type="Through Hole", Output Configuration=Positive, Output Type=Fixed, Packaging=Tube, Part Status=Active, Pricing 1="1=1.54, 10=1.381, 100=1.1097, 500=0.91176, 1000=0.75545 (USD)", Protection Features="Over Current, Over Temperature, Short Circuit", PSRR="80dB (120Hz)", RoHS="RoHS Compliant", Stock 1=304, Supplier 1=Digi-Key, Supplier Device Package=TO-220-3

## Free pads (board coordinates)
  round 6 hole 4: 0(0,0) 0(0,134) 0(148,0) 0(148,134)
  round 2 hole 1: 0(61.035,27.151) 0(61.07,24.651) 0(61.105,29.651) 0(63.535,27.151) 0(63.57,24.651) 0(63.605,29.651) 0(66.035,27.151) 0(66.07,24.651) 0(66.105,29.651) 0(68.535,27.151) 0(68.57,24.651) 0(68.605,29.651) 0(80.723,27.011) 0(80.758,24.511) 0(80.793,29.511) 0(83.223,27.011) 0(83.258,24.511) 0(83.293,29.511) 0(85.723,27.011) 0(85.758,24.511) 0(85.793,29.511) 0(88.223,27.011) 0(88.258,24.511) 0(88.293,29.511)

## Via types
v1: diameter 1, hole 0.5, Top Layer to Bottom Layer, 29 vias
v2: diameter 1.27, hole 0.711, Top Layer to Bottom Layer, 6 vias
v3: diameter 1.5, hole 0.8, Top Layer to Bottom Layer, 1 vias

## Nets (pads, with @x,y where several pads share a name; then routed paths per layer and width w, separated by ;. In a path a pad name is that pad's centre, name@x,y a point inside that pad or via, vN(x,y) a via of type N, cw(c..) or ccw(c..) an arc to the next point about the centre after c; other vN are vias at no path point)
5V: C1.2 C2.2 C3.1 C7.2 C8.2 C9.2 P1.3 P2.2 P2.16 P3.2 P4.2 P5.2 P6.2 P7.2 P8.2 Pot1.2 R19.1 R20.1 R21.2 U1.7 U1.8 U1.41 U3.3 | length 276.5
  Top Layer w0.3: C2.2@62.618,91.66 C1.2@64.35,91.66 65.681,92.991 U1.7@68.475,92.991 71.081,92.991 71.427,92.645 ; U1.8@68.475,92.491 U1.41@79.525,92.491 86.61,92.491 88.539,94.42 C8.2@89.601,94.42 C9.2@91.388,94.42
  Top Layer w0.5: v2(58.962,95.207) 58.962,94.894 58.961,94.892 C3.1@58.961,93.105 60.406,91.66 C2.2@62.618,91.66 ; R21.2@65.741,103.23 66.484,103.23 66.96,103.707 66.96,105.121 67.587,105.748 P1.3@68.773,105.748 ; R20.1@80.232,113.308 v2(81.93,113.308) R19.1@83.649,113.308 93.964,113.308 96.983,116.327 96.983,119.115 95.677,120.421 P2.16@93.05,120.421 ; C7.2@86.019,15.228 86.94,16.149 U3.3@86.94,18.742
  Top Layer w1: P2.2@57.49,120.421 57.627,120.558 Pot1.2@57.627,126
  Top Layer w1.5: U3.3@86.94,18.742 89.41,18.742 95.926,25.258 v3(95.926,29.97)
  Bottom Layer w0.5: v2(58.962,95.207) 58.962,103.103 61.608,105.748 66.734,105.748
  Bottom Layer w1: P1.3@68.773,105.748 71.247,105.748 72.874,107.375 72.874,110.038 76.144,113.308 v2(81.93,113.308)
  Bottom Layer w1.5: Pot1.2@57.627,126 57.49,125.863 P2.2@57.49,120.421 57.49,114.992 66.734,105.748 P1.3@68.773,105.748 ; P2.16@93.05,120.421 93.05,113.797 93.932,112.914 100.354,112.914 102.366,110.903 102.366,78.052 100.978,76.664 87.612,76.664 86.183,75.235 P8.2@86.183,71.089 P7.2@86.183,66.089 P6.2@86.183,61.089 P5.2@86.183,56.089 P4.2@86.183,51.089 P3.2@86.183,46.089 86.183,43.848 87.539,42.492 93.402,42.492 95.926,39.968 v3(95.926,29.97)
12V: C5.1 C6.2 D1.1 D2.1 D3.1 D4.1 D5.1 D6.1 D7.1 D8.1 D9.1 D10.1 D11.1 D12.1 D13.1 D14.1 D15.1 D16.1 K1.4 K2.4 K3.4 K4.4 K5.4 K6.4 K7.4 K8.4 K9.4 K10.4 K11.4 K12.4 K13.4 K14.4 K15.4 K16.4 U2.3 U3.1 | length 553.2
  Top Layer w1: K16.4@30.192,4 33.926,4 35.992,6.066 D16.1@35.992,8.19 ; K15.4@30.192,20 33.464,20 35.992,22.528 D15.1@35.992,24.19 ; K14.4@30.192,36 33.604,36 35.992,38.388 D14.1@35.992,40.19 ; K13.4@30.192,52 33.575,52 35.992,54.417 D13.1@35.992,56.19 ; K12.4@30.192,68 33.614,68 35.992,70.378 D12.1@35.992,72.19 ; K11.4@30.192,84 33.552,84 35.992,86.44 D11.1@35.992,88.19 ; K10.4@30.2,100 33.625,100 36,102.375 D10.1@36,104.19 ; K9.4@30.2,116 33.494,116 36,118.506 D9.1@36,120.19 ; U2.3@67.384,18.742 67.384,18.074 69.23,16.228 73.576,16.228 C5.1@74.373,15.431 77.684,18.742 U3.1@81.86,18.742 ; D1.1@112,11.81 112,13.53 114.47,16 K1.4@117.8,16 ; D2.1@112,27.81 112,29.24 114.76,32 K2.4@117.8,32 ; D3.1@112,43.81 112,45.2 114.8,48 K3.4@117.8,48 ; D4.1@112,59.81 112,61.088 114.912,64 K4.4@117.8,64 ; D5.1@112,75.81 112,77.118 114.882,80 K5.4@117.8,80 ; D6.1@112,91.81 112,93.148 114.852,96 K6.4@117.8,96 ; D7.1@112,107.81 112,109.248 114.752,112 K7.4@117.8,112 ; D8.1@112,123.81 112,125.135 114.865,128 K8.4@117.8,128
  Bottom Layer w1.5: K16.4@30.192,4 33.909,4 36.057,6.148 ; K15.4@30.192,20 34.335,20 36.057,18.277 ; K14.4@30.192,36 34.199,36 36.057,34.141 ; K13.4@30.192,52 33.853,52 36.057,49.796 ; K12.4@30.192,68 33.969,68 36.057,65.912 ; K11.4@30.192,84 34.127,84 36.057,82.07 ; K10.4@30.2,100 34.243,100 36.057,98.186 ; K9.4@30.2,116 34.107,116 36.057,114.05 36.057,98.186 ; U2.3@67.384,18.742 67.384,16.49 66.023,15.129 51.922,15.129 42.94,6.148 36.057,6.148 ; U3.1@81.86,18.742 81.86,16.319 84.309,13.87 101.797,13.87 103.92,15.994 103.946,15.994 ; 103.837,15.885 103.946,15.994 ; K1.4@117.8,16 117.794,15.994 103.946,15.994 ; K2.4@117.8,32 114.488,32 112.055,29.567 ; K3.4@117.8,48 114.468,48 112.055,45.586 ; K4.4@117.8,64 114.818,64 112.055,61.236 ; K5.4@117.8,80 114.799,80 112.055,77.256 ; K6.4@117.8,96 114.364,96 112.055,93.691 ; K7.4@117.8,112 114.806,112 112.055,109.249 ; K8.4@117.8,128 114.648,128 112.055,125.406 112.055,109.249 ; 36.057,6.148 36.057,18.277 ; 36.057,18.277 36.057,34.141 ; 36.057,34.141 36.057,49.796 ; 36.057,49.796 36.057,65.912 ; 36.057,65.912 36.057,82.07 ; 36.057,82.07 36.057,98.186 ; 103.946,15.994 112.055,24.103 112.055,29.567 ; 112.055,29.567 112.055,45.586 ; 112.055,45.586 112.055,61.236 ; 112.055,61.236 112.055,77.256 ; 112.055,77.256 112.055,93.691 ; 112.055,93.691 112.055,109.249
24V: 24V.1 C4.1 U2.1 | length 15
  Top Layer w1: 24V.1@57.08,6.692 57.08,11.321 59.521,13.762 C4.1@60.805,13.762 60.805,17.243 U2.1@62.304,18.742
GND: C1.1 C2.1 C3.2 C4.2 C5.2 C6.1 C7.1 C8.1 C9.1 C10.1 C11.1 C12.1 C13.1 C14.1 C15.1 C16.2 GND.1 GND_.1 P1.4 P2.1 P2.5 P3.1 P4.1 P5.1 P6.1 P7.1 P8.1 pad.0@61.07,24.651 pad.0@61.035,27.151 pad.0@61.105,29.651 pad.0@63.57,24.651 pad.0@63.535,27.151 pad.0@63.605,29.651 pad.0@66.07,24.651 pad.0@66.035,27.151 pad.0@66.105,29.651 pad.0@68.57,24.651 pad.0@68.535,27.151 pad.0@68.605,29.651 pad.0@80.723,27.011 pad.0@80.758,24.511 pad.0@80.793,29.511 pad.0@83.223,27.011 pad.0@83.258,24.511 pad.0@83.293,29.511 pad.0@85.723,27.011 pad.0@85.758,24.511 pad.0@85.793,29.511 pad.0@88.223,27.011 pad.0@88.258,24.511 pad.0@88.293,29.511 Pot1.1 Q1.2 Q2.2 Q3.2 Q4.2 Q5.2 Q6.2 Q7.2 Q8.2 Q9.2 Q10.2 Q11.2 Q12.2 Q13.2 Q14.2 Q15.2 Q16.2 R1.1 R2.1 U1.9 U1.10 U1.13 U1.40 U2.2 U3.2 | length 597.3
  Top Layer w0.3: C2.1@62.618,90.06 C1.1@64.35,90.06 ; C1.1@64.328,89.991 U1.13@68.475,89.991 ; U1.10@68.475,91.491 71.036,91.491 71.386,91.841 71.392,91.841 ; U1.9@68.475,91.991 U1.40@79.525,91.991 87.783,91.991 88.612,92.82 C8.1@89.601,92.82 C9.1@91.388,92.82
  Top Layer w0.5: C3.2@58.961,89.105 60.873,89.105 61.828,90.06 C2.1@62.618,90.06 ; C16.2@65.741,108.275 68.759,108.275 P1.4@68.773,108.288 ; C9.1@91.388,92.82 93.057,92.82 v1(93.857,93.62)
  Top Layer w1: Q16.2@40.942,12.215 42.925,12.215 v1(42.947,12.238) ; Q15.2@40.942,28.2 42.817,28.2 v1(42.987,28.37) ; Q14.2@40.942,43.95 42.958,43.95 v1(42.99,43.918) ; Q13.2@40.942,59.95 41.986,59.95 42.987,60.951 v1(42.987,61.679) ; Q12.2@40.942,75.95 42.967,75.95 v1(42.987,75.97) ; Q11.2@40.942,91.917 41.705,91.917 43.025,93.237 v1(43.025,94.267) ; Q10.2@40.95,107.95 42.95,107.95 v1(42.958,107.958) ; Q9.2@40.95,124.024 50.228,124.024 52.204,126 Pot1.1@55.087,126 55.087,120.558 P2.1@54.95,120.421 ; v2(57.623,88.61) 58.466,88.61 C3.2@58.961,89.105 ; GND.1@64.716,6.627 64.805,6.716 C4.2@64.805,13.762 ; U2.2@64.844,18.742 64.844,13.801 C4.2@64.805,13.762 ; U3.2@84.4,18.742 84.4,16.176 ; 87,37.842 88.723,39.565 P3.1@88.723,46.089 89.406,46.772 89.406,50.406 P4.1@88.723,51.089 89.593,51.959 89.593,55.219 P5.1@88.723,56.089 89.5,56.866 89.5,60.312 P6.1@88.723,61.089 89.137,61.089 89.593,61.545 89.593,65.219 P7.1@88.723,66.089 88.853,66.089 89.5,66.736 89.5,70.312 P8.1@88.723,71.089 89.5,71.866 89.5,73.492 ; v2(90.349,85.35) 90.417,85.283 R2.1@90.417,84.014 ; R1.1@93.488,117 94.977,117 v1(95.017,117.04) ; v1(93.857,93.62) 103.734,93.62 v1(104.868,94.754) ; v1(104.729,23.675) 104.737,23.683 Q2.2@107.05,23.683 ; v1(105.171,39.693) 105.205,39.727 Q3.2@107.05,39.727 ; v1(105.234,71.697) 105.257,71.674 Q5.2@107.05,71.674 ; v1(105.328,55.427) 105.484,55.583 Q4.2@107.05,55.583 ; v1(105.34,87.727) Q6.2@107.05,87.727 ; v1(105.36,103.513) 105.505,103.658 Q7.2@107.05,103.658 ; v1(105.423,119.562) 105.501,119.641 Q8.2@107.05,119.641 ; Q1.2@107.152,7.66 86.097,7.66 84.4,9.357 84.4,16.176 ; C4.2@64.805,13.762 68.025,13.762 68.545,13.242 70.11,13.242 71.921,11.431 C5.2@74.373,11.431 79.655,11.431 84.4,16.176
  Bottom Layer w1: v1@42.987,12.238 v1(42.987,28.37) 42.99,28.373 v1(42.99,43.918) 42.99,61.676 v1(42.987,61.679) v1(42.987,75.97) 43.025,76.008 v1(43.025,94.267) 43.025,107.892 v1(42.958,107.958) 42.958,116.756 52.203,126 Pot1.1@55.087,126 ; P2.1@54.95,120.421 54.95,125.863 Pot1.1@55.087,126 ; v2(57.623,88.61) 62.335,93.321 87.91,93.321 90.349,90.883 90.349,90.21 ; P1.4@68.773,108.288 68.773,109.704 65.11,113.367 P2.5@65.11,120.421 65.11,126.61 67.615,129.115 ; U3.2@84.4,18.742 84.4,21.382 85.4,22.382 87.008,22.382 87.166,22.54 89.941,22.54 91.486,24.085 103.279,24.085 103.626,23.738 v1@104.666,23.738 ; v2(90.349,85.35) 90.349,90.21 ; v1(93.857,93.62) 90.447,90.21 90.349,90.21 ; v1(104.729,23.675) 104.729,118.869 ; v1(105.423,119.562) 104.729,118.869 ; Pot1.1@55.087,126 55.087,127.329 56.873,129.115 67.615,129.115 ; 67.615,129.115 93.805,129.115 96.198,126.723 96.198,118.22 v1(95.017,117.04) 102.9,117.04 104.729,118.869
NetC10_2: C10.2 P3.3 U1.25 | length 55.8
  Top Layer w0.3: v1(70.826,78.96) 70.826,80.565 74.25,83.99 U1.25@74.25,86.716 U1.25@74.25,87.351
  Top Layer w0.5: P3.3@83.643,46.089 83.643,47.436 84.796,48.589 C10.2@87.147,48.589
  Bottom Layer w0.3: v1(70.826,78.96) 70.826,76.982 75.205,72.603 75.205,50.232 79.348,46.089 P3.3@83.643,46.089
NetC11_2: C11.2 P4.3 U1.26 | length 50.2
  Top Layer w0.3: v1(72.392,79.665) 72.392,81.08 73.881,82.569 74.75,83.439 74.75,83.881 U1.26@74.75,86.716 U1.26@74.75,87.356
  Top Layer w0.5: P4.3@83.643,51.089 83.643,52.369 84.863,53.589 C11.2@87.363,53.589
  Bottom Layer w0.3: v1(72.392,79.665) 72.392,77.139 75.888,73.643 75.888,54.017 78.816,51.089 P4.3@83.643,51.089
NetC12_2: C12.2 P5.3 U1.27 | length 44.7
  Top Layer w0.3: v1(74.193,80.213) 74.193,81.701 75.25,82.758 U1.27@75.25,86.716 U1.27@75.25,87.384
  Top Layer w0.5: P5.3@83.643,56.089 83.643,57.349 84.883,58.589 C12.2@87.383,58.589
  Bottom Layer w0.3: v1(74.193,80.213) 74.193,77.12 76.595,74.717 76.595,57.141 77.647,56.089 P5.3@83.643,56.089